# Altium PCB BoilerAutoFill.PcbDoc
Units mil, origin at the board's own origin, x right, y up, seen from the top; angles counter-clockwise.
Board outline 2200 x 3300 mil, 2 copper layers (Top Layer, Bottom Layer); 22 components, 16 nets, 101 pads, 193 vias.
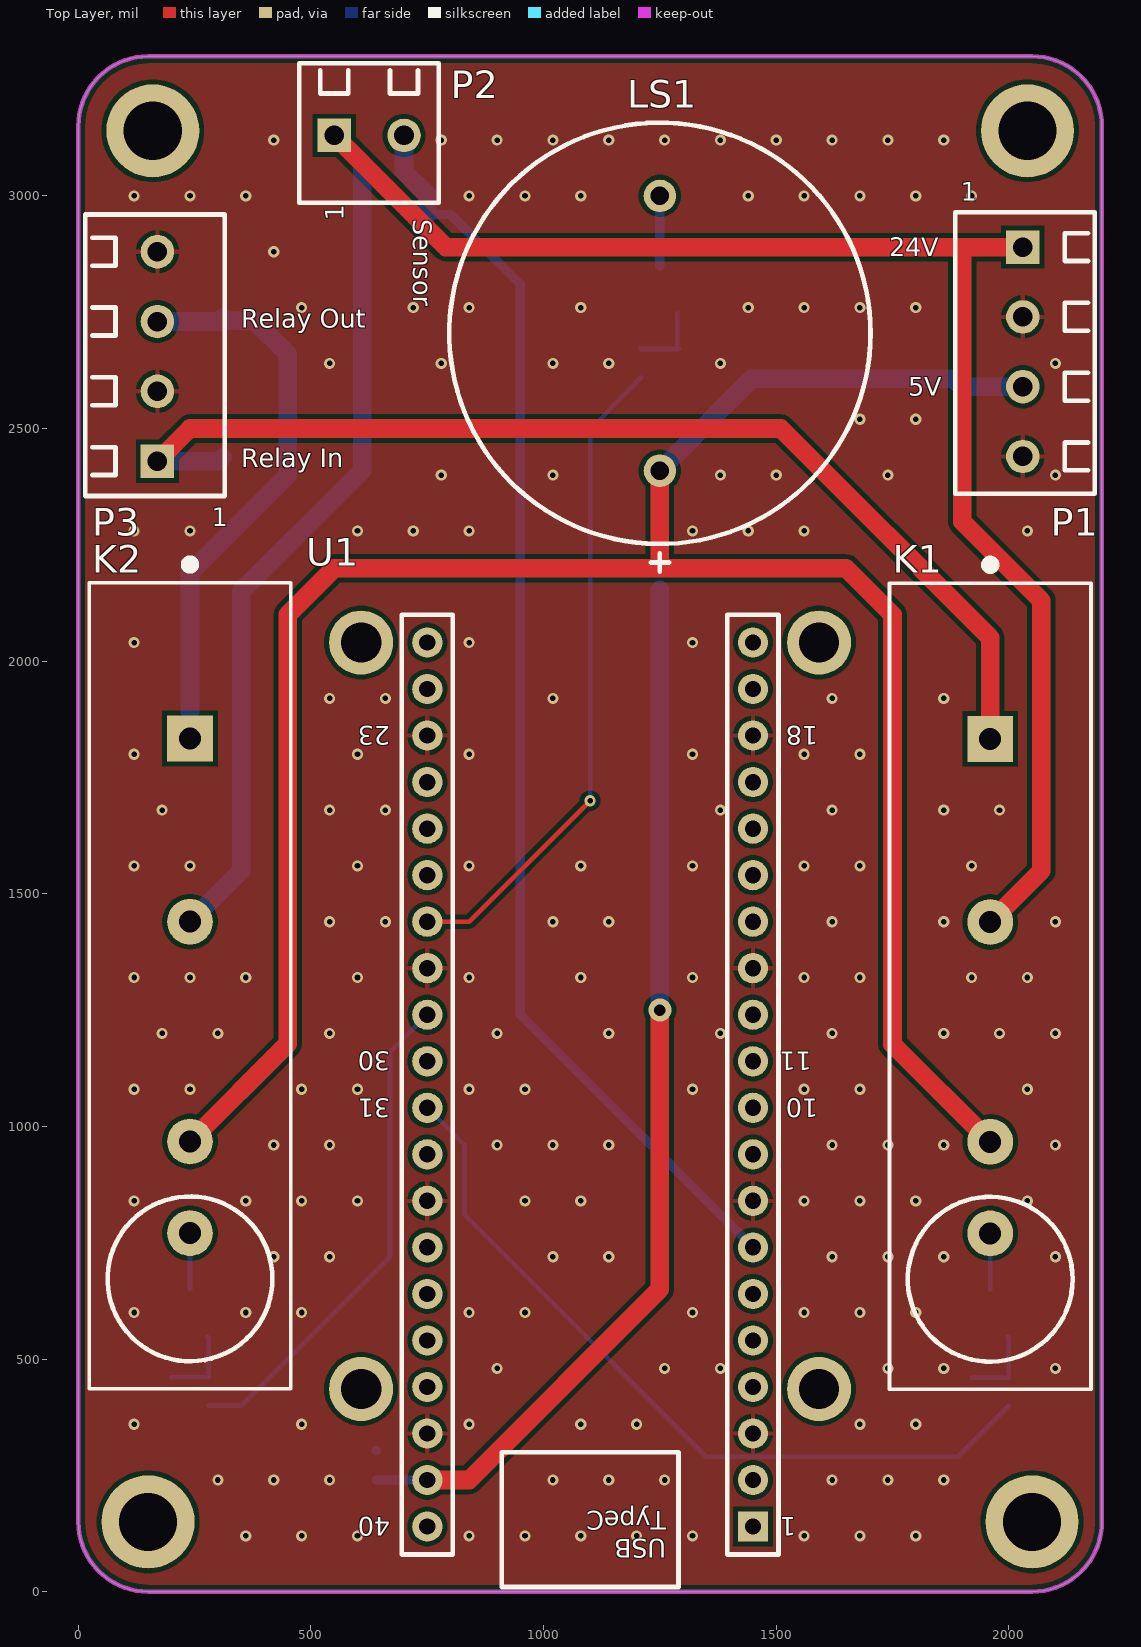
[diagram p0: Top Layer view]
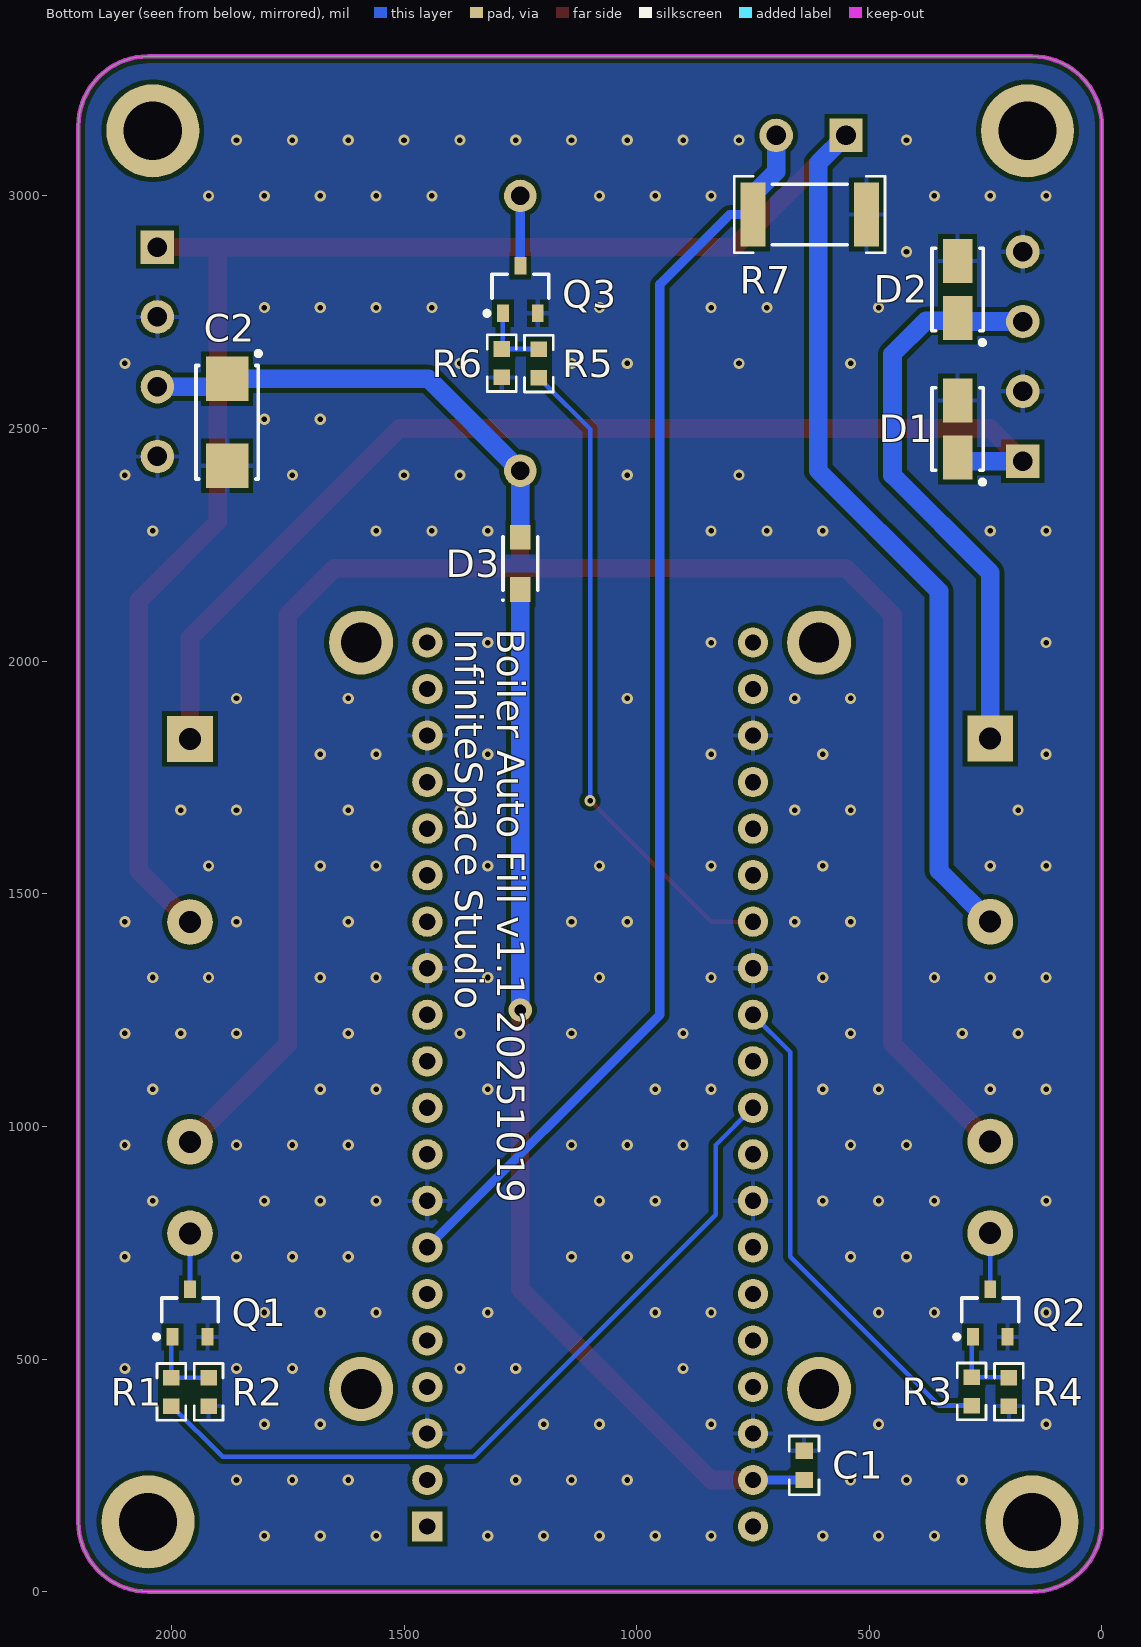
[diagram p1: Bottom Layer view, seen from below]
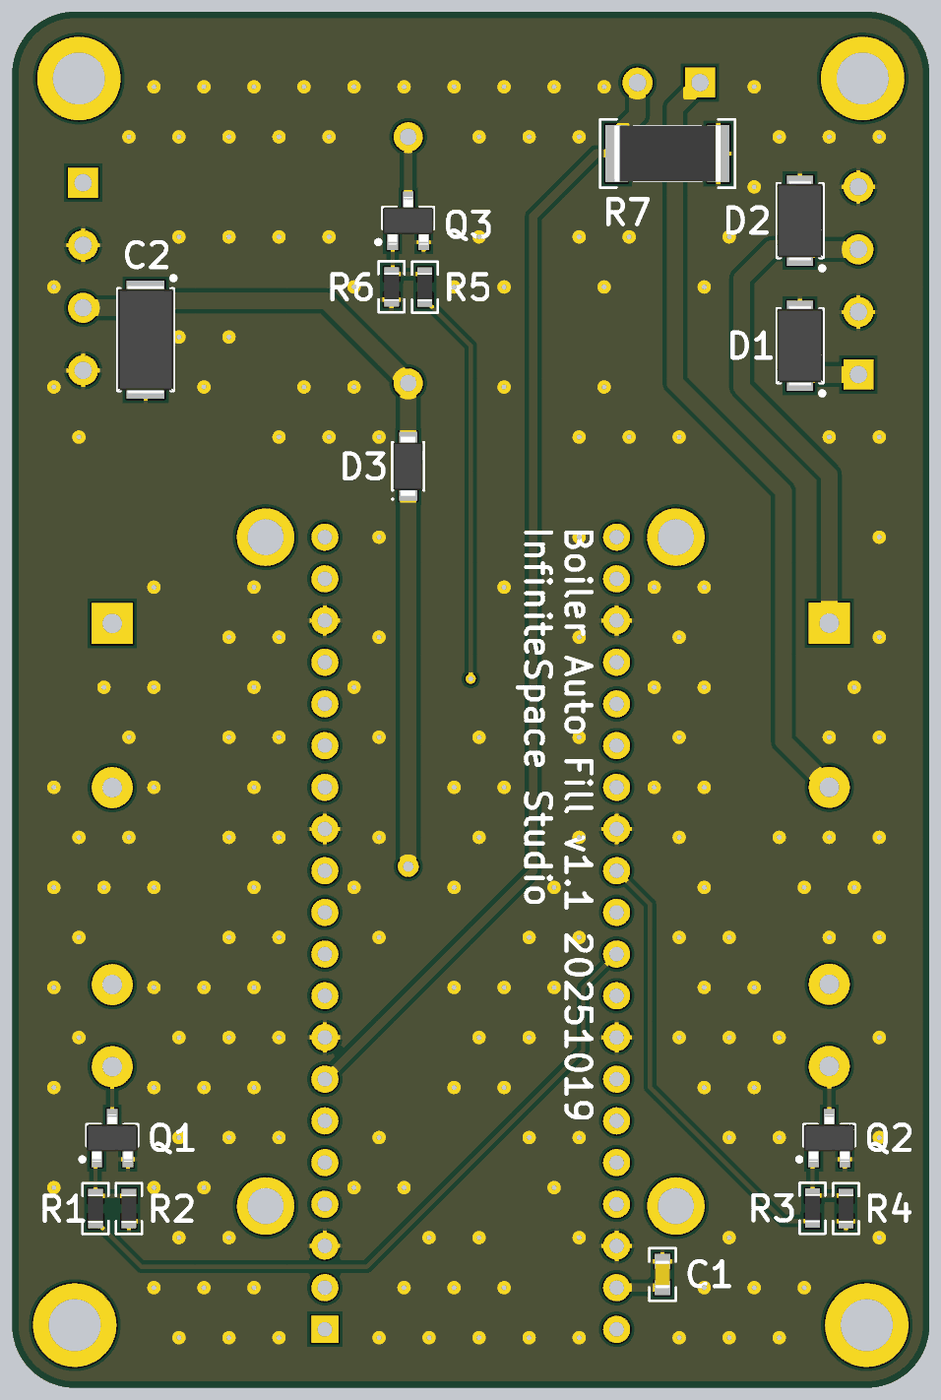
[diagram p2: 3D render of the assembled board from below, using the file's embedded part models]

## Layer stack, top to bottom
Top Solder: solder mask 0.4, Solder Resist, Dk 3.5
Top Layer: signal copper 1.4
Dielectric 1: dielectric 12.6, FR-4, Dk 4.8
Bottom Layer: signal copper 1.4
Bottom Solder: solder mask 0.4, Solder Resist, Dk 3.5

## Board outline
0,150 0,3150 cw(c150,3150) 150,3300 2050,3300 cw(c2050,3150) 2200,3150 2200,150 cw(c2050,150) 2050,0 150,0 cw(c150,150)

## Design rules (kind name [scope] priority, off if disabled: settings)
Clearance [All] p1: gap=10 ignorepadtopadclearanceinfootprint=FALSE
HoleSize [All] p1: absolutevalues=TRUE maxlimit=150 minlimit=1 maxpercent=80.000 minpercent=20.000
PolygonConnect [All] p1: connectstyle=Relief reliefconductorwidth=10 reliefentries=4 polygonreliefangle="90 Angle" airgapwidth=10
RoutingVias [All] p1: holewidth=12 width=24 viastyle="Through Hole" minholewidth=12 minwidth=24 maxholewidth=28 maxwidth=50
SolderMaskExpansion [All] p1: expansion=4 istentingtop=FALSE
SupplyNets "Schematic Supply Nets_2" [InNet('GND')] p1: voltage=0.000
SupplyNets "Schematic Supply Nets_1" [InNet('VCC_5V')] p2: voltage=0.000
SupplyNets "Schematic Supply Nets" [InNet('VCC_24V')] p3: voltage=0.000
Width Width_VCC_24V [InNet('VCC_24V')] p1: maxlimit=50 minlimit=10 preferedwidth=20
Width Width_VCC_5V [InNet('VCC_5V')] p2: maxlimit=50 minlimit=10 preferedwidth=20
Width [All] p3: maxlimit=50 minlimit=10 preferedwidth=10
29 further rules are at their usual default settings.

## Components (designator, comment, footprint, x,y, rotation, side; value= is the part's Value field where it differs from the comment)
C1 "Cap" CAP0603/M 640,271.5 r90 bottom value=100nF
C2 "Cap Pol" CAPMP6032/M 1880,2513.5 r270 bottom value=10uF
D1 "US1M" DO-214AC/M 310,2498.98 r270 bottom
D2 "US1M" DO-214AC/M 310,2798.98 r270 bottom
D3 "MRB230LSFT1G" SOD-123FL/M 1250,2210 r90 bottom
K1 "ENMG Solid State Relay" PMN5D6132 1960,1832.99 r180 top
K2 "ENMG Solid State Relay" PMN5D6132 240,1833.7 r180 top
LS1 "Buzzer" BUZZER-2310 1250,2409.45 r90 top
P1 "Power" KEFA/KF128L-3.81-04P 2030,2890 r0 top
P2 "Sensor" KEFA/KF128L-3.81-02P 550,3130 r90 top
P3 "Valve" KEFA/KF128L-3.81-04P 170,2430 r180 top
Q1 "NPN" SOT-23/M 1960,598.82 r90 bottom
Q2 "NPN" SOT-23/M 240,598.82 r90 bottom
Q3 "NPN" SOT-23/M 1250,2798.82 r90 bottom
R1 "Res" RES0603/M 2000,429.49 r90 bottom value=2K
R2 "Res" RES0603/M 1920,429.49 r90 bottom value=10K
R3 "Res" RES0603/M 280,430.51 r90 bottom value=2K
R4 "Res" RES0603/M 200,429.49 r90 bottom value=10K
R5 "Res" RES0603/M 1210,2639.49 r270 bottom value=2K
R6 "Res" RES0603/M 1290,2640.51 r90 bottom value=10K
R7 "Res" RES2512/L 627.95,2960 r180 bottom value=180
U1 "ESP32-C6-Touch-LCD-1.9" ESP32-C6-TOUCH-LCD-1.9_SOCKET 1450,140 r180 top

## Footprints (in the part's own frame and the unit in brackets; to place one, negate y for a bottom-side part, rotate by r counter-clockwise, add the part's x,y. Pads: shape width x height; smd on the part's side, far side on the other; paste and mask are expansions set on the pad)
BUZZER-2310 [mil]
  round 70 hole 40: N(590.55,0) P(0,0)
  silkscreen extent -218,-453 748,453, body extent -157,-453 748,453, height 394
CAP0603/M [mm] "Chip Capacitor, 2-Leads, Body 1.60x0.80mm, IPC Medium Density"
  rect 0.9x0.95 smd: 1(-0.8,0) 2(0.8,0)
  silkscreen extent -1.6,-0.81 1.6,0.81, body extent -0.85,-0.45 0.85,0.45, height 0.9
CAPMP6032/M [mm] "Molded Capacitor, 2-Leads, Body 6.00x3.25mm, IPC Medium Density"
  rect 2.45x2.3 smd: N(2.375,0) P(-2.375,0)
  silkscreen extent -3.87,-1.7 3.1,1.82, body extent -3.32,-1.7 3.32,1.7, height 2.8
DO-214AC/M [mm] "Molded Diode, 2-Leads, Body 4.25x2.60mm, IPC Medium Density"
  rect 2.4x1.6 smd: N(1.55,0) P(-1.55,0)
  silkscreen extent -2.25,-1.4 3.02,1.47, body extent -2.47,-1.4 2.47,1.4, height 2.42
ESP32-C6-TOUCH-LCD-1.9_SOCKET [mil]
  rect 65x65 hole 35: 1(0,0)
  round 65 hole 35: 2(0,-100) 3(0,-200) 4(0,-300) 5(0,-400) 6(0,-500) 7(0,-600) 8(0,-700) 9(0,-800) 10(0,-900) 11(0,-1000) 12(0,-1100) 13(0,-1200) 14(0,-1300) 15(0,-1400) 16(0,-1500) 17(0,-1600) 18(0,-1700) 19(0,-1800) 20(0,-1900) 21(700,-1900) 22(700,-1800) 23(700,-1700) 24(700,-1600) 25(700,-1500) 26(700,-1400) 27(700,-1300) 28(700,-1200) 29(700,-1100) 30(700,-1000) 31(700,-900) 32(700,-800) 33(700,-700) 34(700,-600) 35(700,-500) 36(700,-400) 37(700,-300) 38(700,-200) 39(700,-100) 40(700,0)
  round 137.8 hole 86.61: ""(-142.13,-295.67) ""(-142.13,-1900) ""(842.13,-295.67) ""(842.13,-1900)
  silkscreen extent -55,-1960 755,130, body extent -270,-2035 970,135, height 760
KEFA/KF128L-3.81-02P [mil]
  rect 72x72 hole 42: 1(0,0)
  round 72 hole 42: 2(0,-150)
  silkscreen extent -145,-225 155,75
KEFA/KF128L-3.81-04P [mil]
  rect 72x72 hole 42: 1(0,0)
  round 72 hole 42: 2(0,-150) 3(0,-300) 4(0,-450)
  silkscreen extent -145,-530 155,75
PMN5D6132 [mm] "ENMG Solid State Relay PMN5D6132"
  rect 2.5x2.5 hole 1.2: 1(0,0)
  round 2.5 hole 1.2: 2(0,10) 3(0,22) 4(0,27)
  silkscreen extent -5.5,-9.75 5.5,35.5, body extent -5.5,-8.5 5.5,35.5, height 21.5
RES0603/M [mm] "Chip Resistor, 2-Leads, Body 1.60x0.80mm, IPC Medium Density"
  rect 0.85x0.9 smd: 1(-0.775,0) 2(0.775,0)
  silkscreen extent -1.55,-0.79 1.55,0.79, body extent -0.85,-0.45 0.85,0.45, height 0.45
RES2512/L [mm] "Chip Resistor, 2-Leads, Body 6.35x3.10mm, IPC Low Density"
  rect 1.35x3.5 smd: 1(-3.1,0) 2(3.1,0)
  silkscreen extent -4.11,-2.08 4.11,2.08, body extent -3.22,-1.7 3.22,1.7, height 0.65
SOD-123FL/M [mm] "SODFL, 2-Leads, Body 1.65x3.60mm, IPC Medium Density"
  rect 1.35x1.1 smd: N(-1.425,0) P(1.425,0)
  silkscreen extent -2.05,-0.95 1.45,1, body extent -1.8,-0.9 1.8,0.9, height 0.98
SOT-23/M [mm] "SOT23, 3-Leads, Body 2.90x2.45mm, Pitch 0.95mm, IPC Medium Density"
  rect 0.95x0.65 smd: B(-1.3,0.95) C(1.3,0) E(-1.3,-0.95)
  silkscreen extent -1.42,-1.55 0.82,1.95, body extent -1.45,-1.55 1.45,1.55, height 1.4

## Part data
C1: "Capacitor", LatestRevisionDate=17-Jul-2002, LatestRevisionNote="Re-released for DXP Platform.", PackageDescription="Radial Cap, Thru-Hole; 2 Leads; 0.3 in Pin Spacing", PackageReference=RAD-0.3, Published=8-Jun-2000, Publisher="Altium Limited"
C2: library part CapPol, "Polarized Capacitor", LatestRevisionDate=17-Jul-2002, LatestRevisionNote="Re-released for DXP Platform.", PackageDescription="Polarized Capacitor; 2 Leads", PackageReference=POLAR0.8, Published=8-Jun-2000, Publisher="Altium Limited"
D1 D2: library part "Diode US1M", "1 Amp Ultra Fast Rectifier SMA", ComponentLink1Description="Manufacturer Link", ComponentLink1URL=http://www.fairchildsemi.com/, ComponentLink2Description=Datasheet, ComponentLink2URL=http://www.fairchildsemi.com/ds/1N%2F1N4934.pdf
D3: library part "Diode MRB230LSFT1G", "Schottky Barrier Rectifier 2A 30V", ComponentLink1Description="Manufacturer Link", ComponentLink1URL=http://www.fairchildsemi.com/, ComponentLink2Description=Datasheet, ComponentLink2URL=http://www.fairchildsemi.com/ds/1N%2F1N4934.pdf
K1 K2: library part PMN5D6132, "ENMG Solid State Relay PMN5D6132"
P1 P3: library part Header-4
P2: library part Header-2
Q1 Q2 Q3: library part MMBT5551, "NPN Bipolar Transistor"
R1 R2 R3 R4 R5 R6 R7: "Resistor", LatestRevisionDate=17-Jul-2002, LatestRevisionNote="Re-released for DXP Platform.", PackageDescription="Axial Device, Thru-Hole; 2 Leads; 0.3 in Pin Spacing", PackageReference=AXIAL-0.3, Published=8-Jun-2000, Publisher="Altium Limited"
U1: "WaveShare ESP32-C6-Touch-LCD-1.9"

## Free pads (board coordinates)
  round 200 hole 125: ""(150,150) ""(160,3140) ""(2040,3140) ""(2050,150)

## Via types
v1: diameter 24, hole 12, Top Layer to Bottom Layer, 192 vias
v2: diameter 50, hole 25, Top Layer to Bottom Layer, 1 vias

## Nets (pads, with @x,y where several pads share a name; then routed paths per layer and width w, separated by ;. In a path a pad name is that pad's centre, name@x,y a point inside that pad or via, vN(x,y) a via of type N, cw(c..) or ccw(c..) an arc to the next point about the centre after c; other vN are vias at no path point)
GND: C1.2 C2.N D1.P D2.P P1.2 P1.4 P3.2 P3.4 Q1.E Q2.E Q3.E R2.1 R4.1 R6.1 R7.2 U1.3 U1.8 U1.13 U1.18 U1.23 U1.28 U1.33 U1.38 | length 13.2
  Bottom Layer w20: C1.2 C1.2@640.98,302.99 ; U1.38@741.39,331.39 U1.38
  other v1: 360,120 480,120 600,120 840,120 960,120 1080,120 1200,120 1320,120 1560,120 1680,120 1800,120 300,240 420,240 540,240 1020,240 1140,240 1260,240 1620,240 1740,240 1860,240 120,360 480,360 840,360 1080,360 1200,360 1680,360 1800,360 900,480 1260,480 1380,480 1740,480 1860,480 2100,480 120,600 360,600 480,600 840,600 960,600 1320,600 1560,600 1680,600 1800,600 420,720 540,720 1020,720 1140,720 1620,720 1740,720 1860,720 2100,720 120,840 360,840 480,840 600,840 960,840 1080,840 1560,840 1680,840 1800,840 2040,840 420,960 540,960 900,960 1020,960 1140,960 1620,960 1740,960 1860,960 2100,960 120,1080 240,1080 480,1080 600,1080 840,1080 960,1080 1320,1080 1560,1080 1680,1080 2040,1080 180,1200 300,1200 540,1200 900,1200 1140,1200 1380,1200 1620,1200 1860,1200 1980,1200 2100,1200 120,1320 240,1320 360,1320 600,1320 840,1320 1080,1320 1320,1320 1560,1320 1680,1320 1920,1320 2040,1320 540,1440 660,1440 1020,1440 1140,1440 1620,1440 1860,1440 2100,1440 120,1560 240,1560 600,1560 840,1560 1080,1560 1320,1560 1560,1560 1680,1560 1920,1560 180,1680 540,1680 660,1680 1380,1680 1620,1680 1860,1680 1980,1680 120,1800 600,1800 840,1800 1320,1800 1560,1800 1680,1800 540,1920 660,1920 1020,1920 1620,1920 1860,1920 120,2040 840,2040 1320,2040 120,2280 240,2280 600,2280 720,2280 840,2280 1320,2280 1440,2280 1560,2280 2040,2280 780,2400 1020,2400 1380,2400 1500,2400 1740,2400 2100,2400 1680,2520 1800,2520 540,2640 780,2640 1020,2640 1140,2640 1380,2640 2100,2640 480,2760 720,2760 840,2760 1080,2760 1440,2760 1560,2760 1680,2760 1800,2760 420,2880 120,3000 240,3000 360,3000 840,3000 960,3000 1080,3000 1440,3000 1560,3000 1680,3000 1800,3000 1920,3000 420,3120 780,3120 900,3120 1020,3120 1140,3120 1260,3120 1380,3120 1500,3120 1620,3120 1740,3120 1860,3120
NetC1_1: C1.1 D3.N U1.39 | length 2283.7
  Top Layer w40: U1.39 840,240 1250,650 v2(1250,1250)
  Bottom Layer w20: C1.1 U1.39
  Bottom Layer w40: v2(1250,1250) D3.N
NetD1_N: D1.N K1.1 P3.1 | length 2365.7
  Top Layer w40: P3.1 240,2500 1510,2500 1960,2050 K1.1
  Bottom Layer w40: P3.1 302.05,2430 D1.N
NetD2_N: D2.N K2.1 P3.3 | length 1228.9
  Bottom Layer w40: P3.3 302.05,2730 D2.N 316.02,2731.94 378.06,2731.94 450,2660 450,2400 240,2190 K2.1
NetK1_4: K1.4 Q1.C | length 120
  Bottom Layer w10: Q1.C K1.4
NetK2_4: K2.4 Q2.C | length 120.7
  Bottom Layer w10: Q2.C K2.4
NetLS1_N: LS1.N Q3.C | length 150
  Bottom Layer w20: Q3.C LS1.N
NetP2_2: P2.2 R7.1 U1.7 | length 2729.9
  Bottom Layer w20: R7.1 800,2960 950,2810 950,1240 U1.7
  Bottom Layer w40: P2.2 700,3052.32 750,3002.32 R7.1
NetQ1_B: Q1.B R1.2 R2.2 | length 168.7
  Bottom Layer w10: R2.2 R1.2 2000,545.04 Q1.B
NetQ2_B: Q2.B R3.2 R4.2 | length 168.1
  Bottom Layer w10: R4.2 201.02,461.02 R3.2 280,545.04 Q2.B
NetQ3_B: Q3.B R5.1 R6.2 | length 160.9
  Bottom Layer w10: R5.1@1207.4,2672.6 1208.98,2671.02 R6.2 1287.4,2673.62 Q3.B
NetR1_1: R1.1 U1.31 | length 1693.7
  Bottom Layer w10: U1.31 830,960 830,810 1350,290 1890.04,290 1999.02,398.98 R1.1
NetR3_1: R3.1 U1.29 | length 1075.7
  Bottom Layer w10: R3.1 350,400 670,720 670,1160 U1.29
NetR5_2: R5.2 U1.27 | length 1412.8
  Top Layer w10: U1.27 840,1440 v1(1100,1700)
  Bottom Layer w10: v1(1100,1700) 1100,2498.98 1197.28,2596.26 1197.28,2597.24 1209.02,2608.98 R5.2
VCC_5V: C2.P D3.P K1.3 K2.3 LS1.P P1.3 | length 5044.1
  Top Layer w40: K2.3 450,1177.56 450,2100 550,2200 1250,2200 ; LS1.P 1250,2200 ; K1.3 1750,1176.85 1750,2100 1650,2200 1250,2200
  Bottom Layer w40: D3.P LS1.P 1447.56,2607.01 C2.P 1897.01,2590 P1.3
VCC_24V: K1.2 K2.2 P1.1 P2.1 | length 5014.2
  Top Layer w40: P2.1 790,2890 1900,2890 ; K1.2 2070,1549.29 2070,2130 1900,2300 1900,2890 ; P1.1 1900,2890
  Bottom Layer w40: K2.2 350,1550 350,2150 610,2410 610,3070 P2.1
pads on no net: U1. U1.1 U1.2 U1.4 U1.5 U1.6 U1.9 U1.10 U1.11 U1.12 U1.14 U1.15 U1.16 U1.17 U1.19 U1.20 U1.21 U1.22 U1.24 U1.25 U1.26 U1.30 U1.32 U1.34 U1.35 U1.36 U1.37 U1.40

## Polygon pours and split planes (outlines as drawn)
GND on Top Layer "GND_L01_P000" (solid, pour order 0): 10,10 2190,10 2190,3290 10,3290
GND on Bottom Layer "GND_L02_P001" (solid, pour order 1): 10,10 2190,10 2190,3290 10,3290

## Keep-outs
Keep-Out Layer:
  the board outline again, w10

## Silkscreen, mask and mechanical layers (free items; w line width, h text height)
Top Overlay:
  text "Sensor" at 720.01,2950 h40 r270
  text "24V" at 1743.37,2870.01 h40
  text "Relay Out" at 350,2716.67 h40
  text "5V" at 1783.35,2570.01 h40
  text "Relay In" at 350,2416.67 h40
Bottom Overlay:
  text "Boiler Auto Fill v1.1 20251019 / InfiniteSpace Studio" at 1390,2070 h60 r90

## Text inside footprints (layer, text, board x,y; h text height)
P1: Top Overlay "1" at 1896.67,2990.01 h40
P2: Top Overlay "1" at 569.99,2946.67 h40 r90
P3: Top Overlay "1" at 286.67,2290.01 h40
U1: Top Overlay "USB / TypeC" at 1263.28,172.65 h40 r180; Top Overlay "1" at 1543.33,159.99 h40 r180; Top Overlay "10" at 1589.98,1059.99 h40 r180; Top Overlay "11" at 1576.65,1159.99 h40 r180; Top Overlay "18" at 1589.98,1859.99 h40 r180; Top Overlay "23" at 670,1859.99 h40 r180; Top Overlay "30" at 670,1159.99 h40 r180; Top Overlay "31" at 670,1059.99 h40 r180; Top Overlay "40" at 670,159.99 h40 r180